# Altium PCB MainBoard.PcbDoc
Units mm, origin at the board's own origin, x right, y up, seen from the top; angles counter-clockwise.
Board outline 111.42 x 30.06 mm, 2 copper layers (Top Layer, Bottom Layer), stack 1.57 mm thick; 73 components, 57 nets, 246 pads, 45 vias.
Unrouted connection lines stored in the file: 7.
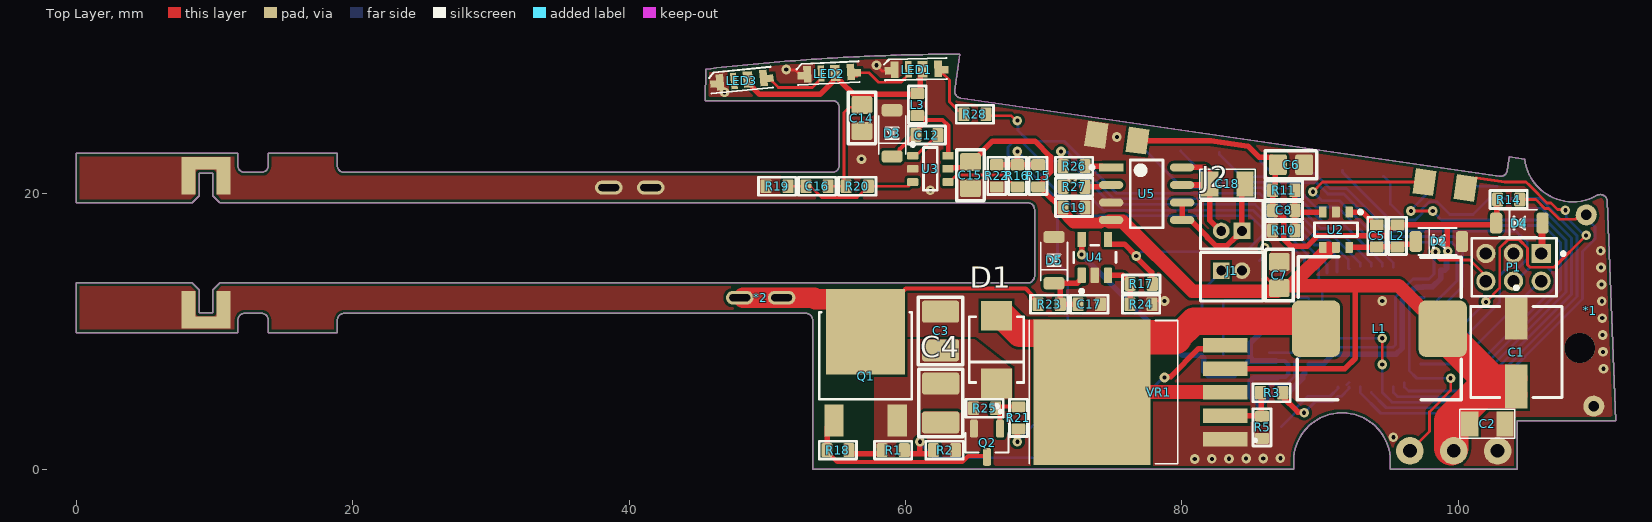
[diagram p0: Top Layer view]
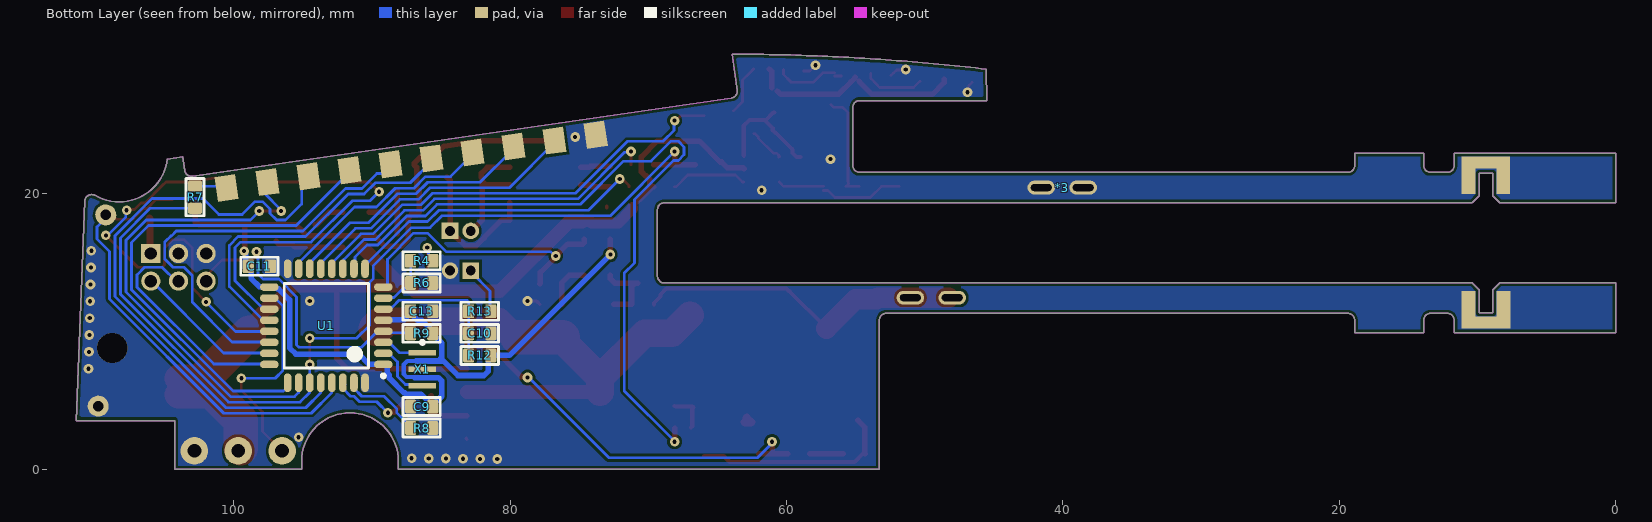
[diagram p1: Bottom Layer view, seen from below]
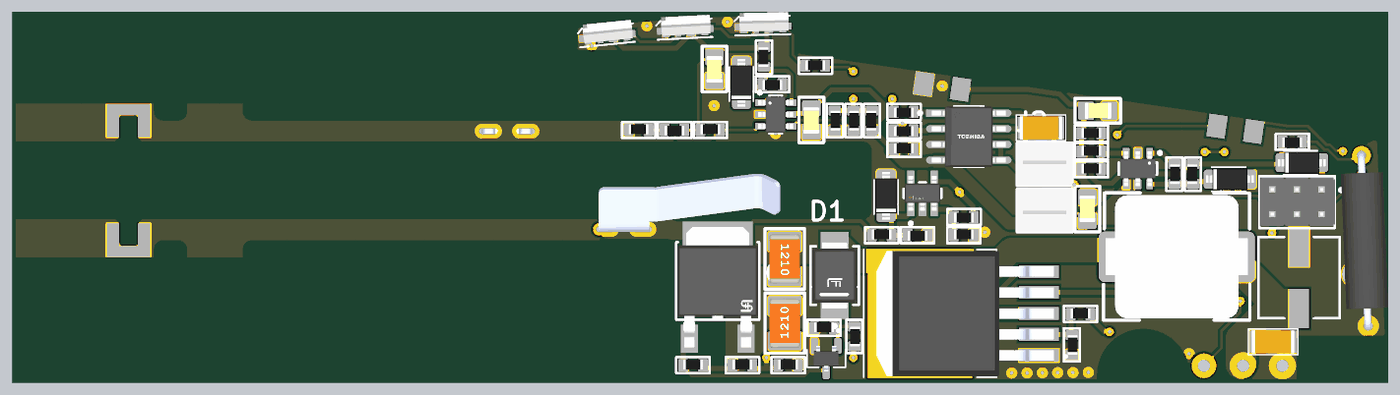
[diagram p2: 3D render of the assembled board from above, using the file's embedded part models]
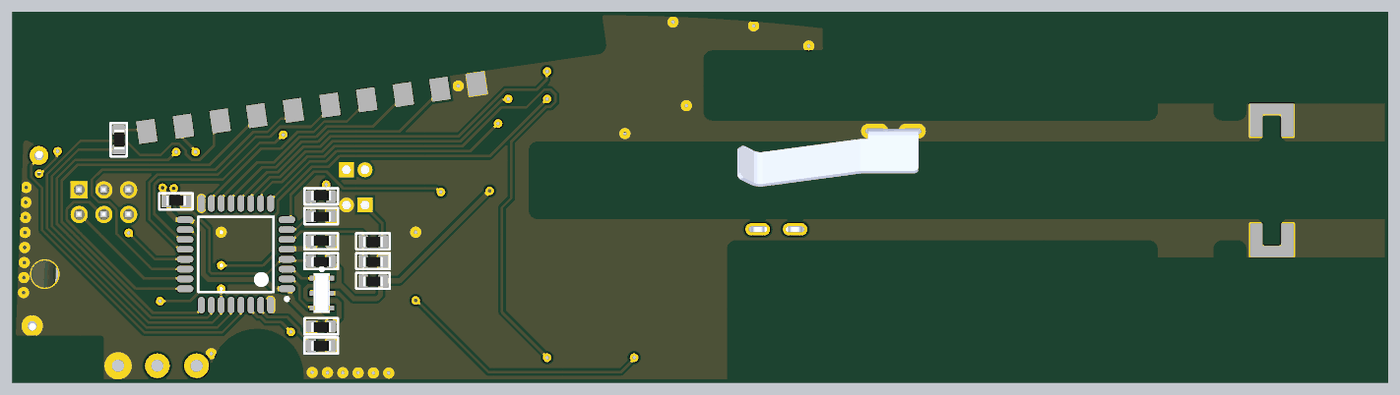
[diagram p3: 3D render of the assembled board from below, using the file's embedded part models]

## Layer stack, top to bottom
Top Solder: solder mask 0.0102, Solder Resist, Dk 3.5
Top Layer: signal copper 0.0356
Dielectric 1: core 1.4986, Core-043, Dk 4.3
Bottom Layer: signal copper 0.0356
Bottom Solder: solder mask 0.0102, Solder Resist, Dk 3.5

## Board outline
-0.013,9.897 11.691,9.897 11.691,10.797 cw(c12.191,10.797) 12.191,11.297 13.391,11.297 cw(c13.391,10.797) 13.891,10.797 13.891,9.897 18.891,9.897 18.891,10.797 cw(c19.391,10.797) 19.391,11.297 52.787,11.297 cw(c52.787,10.797) 53.287,10.797 53.287,0.001 88.087,0.001 88.087,0.601 cw(c91.587,0.601) 95.087,0.601 95.087,0.001 104.274,0.001 104.274,3.543 111.386,3.543 111.406,3.544 110.78,19.419 ccw(c110.28,19.399) 110.031,19.833 cw(c108.29,22.869) 104.813,22.466 103.691,22.629 103.547,21.639 cw(c103.052,21.711) 102.98,21.217 102.98,21.216 63.989,26.88 cw(c64.061,27.375) 63.567,27.447 63.946,30.056 63.561,30.055 63.175,30.053 62.79,30.049 62.405,30.045 62.02,30.041 61.635,30.035 61.251,30.028 60.866,30.02 60.481,30.012 60.096,30.002 59.712,29.992 59.327,29.981 58.943,29.969 58.559,29.955 58.175,29.941 57.791,29.926 57.407,29.911 57.023,29.894 56.639,29.876 56.256,29.858 55.872,29.838 55.489,29.818 55.106,29.796 54.722,29.774 54.339,29.751 53.956,29.727 53.573,29.702 53.19,29.676 52.807,29.649 52.424,29.622 52.041,29.593 51.659,29.564 51.276,29.533 50.893,29.502 50.511,29.47 50.128,29.437 49.746,29.403 49.363,29.368 48.981,29.332 48.599,29.295 48.216,29.257 47.834,29.219 47.452,29.179 47.07,29.139 46.688,29.098 46.307,29.056 45.925,29.013 45.543,28.969 45.504,26.698 54.699,26.698 cw(c54.699,26.198) 55.199,26.198 55.199,21.997 cw(c54.699,21.997) 54.699,21.497 19.391,21.497 cw(c19.391,21.997) 18.891,21.997 18.891,22.897 13.891,22.897 13.891,21.997 cw(c13.391,21.997) 13.391,21.497 12.191,21.497 cw(c12.191,21.997) 11.691,21.997 11.691,22.897 -0.013,22.897 -0.013,19.297 8.391,19.297 8.891,19.797 8.891,21.428 9.891,21.428 9.891,19.797 10.391,19.297 68.841,19.297 cw(c68.841,18.797) 69.341,18.797 69.341,13.997 cw(c68.841,13.997) 68.841,13.497 10.391,13.497 9.891,12.997 9.891,11.341 8.891,11.341 8.891,12.997 8.391,13.497 -0.013,13.497

## Design rules (kind name [scope] priority, off if disabled: settings)
BoardOutlineClearance [All] p1: gap=0 ignorepadtopadclearanceinfootprint=FALSE except(0.25: Track-OutlineEdge Track-CavityEdge Track-CutoutEdge Track-SplitBarrior Via-OutlineEdge Via-CavityEdge Via-CutoutEdge Via-SplitBarrior Text-OutlineEdge Text-CavityEdge Text-CutoutEdge Text-SplitBarrior)
Clearance Clearance_1 [InNamedPolygon('GND_L01_P002')] p1: gap=0.2 ignorepadtopadclearanceinfootprint=FALSE except(0: Arc-Hole Track-Hole SMDPad-Hole THPad-Hole Via-Hole Fill-Hole Poly-Hole Region-Hole Text-Hole)
Clearance [All] p2: gap=0.2 ignorepadtopadclearanceinfootprint=FALSE except(0: Arc-Hole Track-Hole SMDPad-Hole THPad-Hole Via-Hole Fill-Hole Poly-Hole Region-Hole Text-Hole)
MinimumSolderMaskSliver [All] p1: minsoldermaskwidth=0.2
PolygonConnect [All] p1: connectstyle=Direct reliefconductorwidth=0.254 reliefentries=4 polygonreliefangle="90 Angle" airgapwidth=0.254
RoutingVias [All] p1: holewidth=0.3 width=0.7 viastyle="Through Hole" minholewidth=0.3 minwidth=0.7 maxholewidth=1 maxwidth=1.5
SilkToSilkClearance [All] p1: silktosilkclearance=0.2
SilkToSolderMaskClearance [IsPad] p1: minsilkscreentomaskgap=0.2 clearancetoexposedcopper=TRUE
SolderMaskExpansion [All] p1: expansion=0.102 istentingtop=FALSE
Width [All] p1: maxlimit=4 minlimit=0.2 preferedwidth=0.2 minimp=50.000000 maximp=50.000000 favimp=50.000000
27 further rules are at their usual default settings.

## Components (designator, comment, footprint, x,y, rotation, side; value= is the part's Value field where it differs from the comment)
*1 "SW-200D" SW-200D 109.384,11.521 r272.26 top
*2 "Clipse" CLIPSE 48.01,12.428 r0 top locked
*3 "Clipse" CLIPSE 38.534,20.399 r0 bottom locked
C1 "47uF 50V" FP-THV6.3X7.7-MFG 104.2,8.5 r0 top
C2 "0.1uF" 1206 102.1,3.3 r180 top
C3 "100uF" C1210 62.538,10.023 r270 top
C4 "100uF" C1210 62.548,4.808 r90 top
C5 "0.1uF" R0603 94.1,16.904 r270 top
C6 "10uF" C0805 87.9,22.05 r180 top
C7 "4.7uF 50V" C0805 87.05,14.07 r270 top
C8 "33pF" R0603 87.373,18.75 r0 top
C9 "0.1uF" R0603 86.4,4.55 r0 bottom
C10 "0.1uF" R0603 82.2,9.85 r0 bottom
C11 "0.1uF" R0603 98.15,14.7 r180 bottom
C12 "0.1uF" R0603 61.55,24.2 r180 top
C13 "0.1uF" R0603 86.4,11.45 r180 bottom
C14 "10uF" C0805 56.85,25.43 r90 top
C15 "4.7uF 50V" C0805 64.7,21.3 r90 top
C16 "33pF" R0603 53.61,20.49 r180 top
C17 "2.2nF" R0603 73.3,11.95 r180 top
C18 "0.1uF" 1206 83.3,20.66 r0 top
C19 "0.1uF" R0603 72.2,18.95 r0 top
D1 "SK56" DO-214AA(SMB) 66.586,8.674 r90 top
D2 "" SOD-123 98.6,16.5 r180 top
D3 "" SOD-123 59.03,24.32 r270 top
D4 "" SOD-123 104.422,17.83 r180 top
D5 "1N5819HW" SOD-123 70.75,15.15 r270 top
J1 "Conn_JST_B2B-ZR_eec" JST_B2B-ZR_0 83.6,13.943 r0 top
J2 "Conn_JST_B2B-ZR_eec" JST_B2B-ZR_0 83.6,17.71 r180 top
L1 "1040" IND_1040 94.3,10.2 r180 top value=33uH
L2 "4.7µH" INDC1608X06L 95.6,16.904 r90 top
L3 "4.7µH" INDC1608X06L 60.86,26.4 r90 top
LED1 "SK6812SIDE-A-RVS" SK6812SIDE-A-RVS#1 60.665,29.16 r181.26 top
LED2 "SK6812SIDE-A-RVS" SK6812SIDE-A-RVS#2 54.339,28.873 r182.95 top
LED3 "SK6812SIDE-A-RVS" SK6812SIDE-A-RVS#3 48.01,28.361 r185.83 top
P1 "TSW-103-07-G-D" "DS-1025-05 - 2x3" 102,14.63 r180 top
Q1 "TSM480P06CP ROG" FP-TO-252-MFG 57.112,8.235 r0 top
Q2 "BC847A" SOT95P237X112-3N 65.9,1.935 r270 top
R1 "18.2K" R0603 59.112,1.4 r0 top
R2 "1K" R0603 62.825,1.4 r0 top
R3 "470" R0603 86.5,5.55 r0 top
R4 "100K" R0603 86.4,15.1 r180 bottom
R5 "100К" R0603 85.8,3.05 r270 top
R6 "10K" R0603 86.4,13.5 r0 bottom
R7 "470" R0603 102.798,19.702 r270 bottom
R8 "10K" R0603 86.4,3 r0 bottom
R9 "10K" R0603 86.4,9.85 r0 bottom
R10 "40.2K" R0603 87.373,17.3 r0 top
R11 "124K" R0603 87.373,20.2 r0 top
R12 "10K" R0603 82.2,8.25 r0 bottom
R13 "470" R0603 82.2,11.45 r0 bottom
R14 "10K" R0603 103.65,19.53 r180 top
R15 "~" R0603 69.6,21.25 r90 top
R16 "470" R0603 68.1,21.25 r270 top
R17 "200K" R0603 77.059,13.427 r180 top
R18 "10K" R0603 55.112,1.4 r0 top
R19 "23.7K" R0603 50.71,20.49 r0 top
R20 "124K" R0603 56.51,20.49 r0 top
R21 "1K" R0603 68.17,3.73 r270 top
R22 "100К" R0603 66.6,21.25 r270 top
R23 "10K" R0603 70.4,11.95 r0 top
R24 "1K" R0603 77.05,11.95 r0 top
R25 "100K" R0603 65.727,4.43 r0 top
R26 "470" R0603 72.2,21.95 r180 top
R27 "470" R0603 72.2,20.45 r180 top
R28 "470" R0603 65.023,25.7 r0 top
U1 "STM32F030K6T6" LQFP32_L 93.3,10.4 r0 bottom
U2 "BL9342" SOT23-6 91.15,17.35 r270 top
U3 "BL9342" SOT23-6 61.8,21.75 r0 top
U4 "LMV321IDBVR" FP-DBV0005A-MFG 73.7,15.35 r90 top
U5 "RZ7899" SOP-8_2-5R1S-IPC_B 77.45,19.95 r0 top
VR1 "XL6009" DPAK170P1435X465-6N 77,5.6 r180 top
X1 "CSTCE8M00G55-R0" MURA-CSTCE_G_A-3_V 86.35,7.25 r270 bottom

## Footprints (in the part's own frame and the unit in brackets; to place one, negate y for a bottom-side part, rotate by r counter-clockwise, add the part's x,y. Pads: shape width x height; smd on the part's side, far side on the other; paste and mask are expansions set on the pad)
1206 [mm] "Chip Capacitor, 2-Leads, Body 3.5x1.9mm, IPC High Density"
  rect 1.25x1.8 smd: 1(-1.275,0) 2(1.275,0)
  silkscreen extent -2,-1.05 2,1.05, body extent -1.75,-0.95 1.75,0.95, height 1.9
C0805 [mm]
  rrect25% 1.3x1.5 smd: 1(-0.95,0) 2(0.95,0)
  silkscreen extent -1.85,-1 1.85,1, body extent -1.1,-0.65 1.05,0.65, height 1.15
C1210 [mm]
  rrect25% 1.6x2.7 smd: 1(-1.4,0) 2(1.4,0)
  silkscreen extent -2.45,-1.6 2.45,1.6, body extent -2,-1.24 2,1.24, height 1.7
CLIPSE [mm]
  oval 2x1 hole 0.5 slot 1.5 at 0 deg: 1(0,0) 1(3.03,0)
  body extent -0.53,-0.2 14.16,4.51, height 4.5
DO-214AA(SMB) [mm]
  rect 2.16x2.26 smd paste+0 mask+0: 1(-2.45,0) 2(2.45,0)
  silkscreen extent -4.22,-1.97 2.37,1.97, body extent -3.63,-2.07 3.63,2.07, height 0.25
DPAK170P1435X465-6N [mm]
  rect 3.21x1.05 smd: 1(-6.13,3.4) 2(-6.13,1.7) 3(-6.13,0) 4(-6.13,-1.7) 5(-6.13,-3.4)
  rect 8.46x10.53 smd paste-6: 6(3.5,0)
  silkscreen extent -8.4,-5.18 8.05,5.18, body extent -7.34,-5.07 7.01,5.09, height 4.65
"DS-1025-05 - 2x3" [mm]
  rect 1.39x1.39 hole 0.89 paste-1000 mask+0: 1(-4,-1)
  round 1.39 hole 0.89 paste-1000 mask+0: 2(-4,1) 3(-2,-1) 4(-2,1) 5(0,-1) 6(0,1)
  silkscreen extent -5.72,-2.1 1.02,2.1, body extent -5.1,-1.99 0.97,1.94, height 4.88
FP-DBV0005A-MFG [mm]
  rrect17% 1.1x0.6 smd paste+0 mask+0: 1(-1.3,0.95) 2(-1.3,0) 3(-1.3,-0.95) 4(1.3,-0.95) 5(1.3,0.95)
  silkscreen extent -2.57,-1.53 0.87,1.53, body extent -1.95,-1.78 1.95,1.78, height 0.25
FP-THV6.3X7.7-MFG [mm] "SMD, 2-Leads, Body 6.6x6.6mm, Height 8mm"
  rect 1.6x3.2 smd: 1(0,2.5) 2(0,-2.5)
  silkscreen extent -3.3,-3.3 3.3,4.77, body extent -3.3,-3.65 3.3,3.65, height 8
FP-TO-252-MFG [mm]
  rect 1.4x2.29 smd paste+0 mask+0: 1(-2.285,-4.69) 3(2.285,-4.69)
  rect 5.69x6.18 smd paste+0 mask+0: 4(0,1.745)
  silkscreen extent -3.35,-3.15 3.35,3.15, body extent -3.45,-5.93 3.45,4.93, height 0.25
IND_1040 [mm]
  rrect30% 3.5x4.1 smd: 1(-4.58,0.01) 2(4.59,0.01)
  silkscreen extent -5.92,-5.18 5.94,5.15, body extent -5.75,-5 5.75,5, height 4
INDC1608X06L [mm]
  rrect25% 0.8x1 smd: 1(-0.8,0) 2(0.8,0)
  silkscreen extent -1.35,-0.65 1.35,0.65, body extent -0.8,-0.35 0.8,0.45, height 0.5
JST_B2B-ZR_0 [mm]
  rect 1.2x1.2 hole 0.7 paste-1000 mask+0: 1(-0.75,0.45)
  round 1.2 hole 0.7 paste-1000 mask+0: 2(0.75,0.45)
  silkscreen extent -2.25,-1.75 2.25,1.75, body extent -2.35,-1.85 2.35,1.85, height 0.25
LQFP32_L [mm] "QFP, 32-Leads, Body 7x7mm, Pitch 0.8mm, IPC High Density"
  oval 1.35x0.55 smd: 1(-4.125,2.8) 2(-4.125,2) 3(-4.125,1.2) 4(-4.125,0.4) 5(-4.125,-0.4) 6(-4.125,-1.2) 7(-4.125,-2) 8(-4.125,-2.8) 17(4.125,-2.8) 18(4.125,-2) 19(4.125,-1.2) 20(4.125,-0.4) 21(4.125,0.4) 22(4.125,1.2) 23(4.125,2) 24(4.125,2.8)
  oval 0.55x1.35 smd: 9(-2.8,-4.125) 10(-2,-4.125) 11(-1.2,-4.125) 12(-0.4,-4.125) 13(0.4,-4.125) 14(1.2,-4.125) 15(2,-4.125) 16(2.8,-4.125) 25(2.8,4.125) 26(2,4.125) 27(1.2,4.125) 28(0.4,4.125) 29(-0.4,4.125) 30(-1.2,4.125) 31(-2,4.125) 32(-2.8,4.125)
  silkscreen extent -4.25,-3.05 3.05,3.75, body extent -3.5,-3.5 3.5,3.5, height 1.6
MURA-CSTCE_G_A-3_V [mm] "SMD, 3-Leads, Body 3.2x1.3mm, Pitch 1.2mm"
  rect 0.4x2 smd: 1(-1.2,0) 2(0,0) 3(1.2,0)
  silkscreen extent -2.07,-0.13 -1.83,0.12, body extent -1.6,-0.65 1.6,0.65, height 0.7
R0603 [mm]
  rrect25% 0.8x1 smd: 1(-0.8,0) 2(0.8,0)
  silkscreen extent -1.35,-0.65 1.35,0.65, body extent -0.8,-0.35 0.8,0.45, height 0.5
SK6812SIDE-A-RVS#1 [mm]
  rect 0.5x0.55 smd mask+0.05: 1(-2.181,0.275) 4(1.923,0.275)
  rect 0.55x1.2 smd mask+0.05: 1(-1.7,0.201) 4(1.449,0.198)
  rect 0.7x1.2 smd mask+0.05: 2(-0.575,0.2)
  rect 0.45x1.2 smd mask+0.05: 3(0.45,0.2)
  silkscreen extent -2.3,-0.55 2.2,0.95, body extent -2.2,-0.85 1.8,0.65, height 2
SK6812SIDE-A-RVS#2 [mm]
  rect 0.5x0.55 smd mask+0: 1(-2.181,0.275) 4(1.923,0.275)
  rect 0.55x1.2 smd mask+0.05: 1(-1.7,0.201) 4(1.449,0.198)
  rect 0.7x1.2 smd mask+0.05: 2(-0.575,0.2)
  rect 0.45x1.2 smd mask+0.05: 3(0.45,0.2)
  silkscreen extent -2.3,-0.55 2.2,0.95, body extent -2.2,-0.85 1.8,0.65, height 2
SK6812SIDE-A-RVS#3 [mm]
  rect 0.5x0.55 smd mask+0.05: 1(-2.181,0.275) 4(1.923,0.275)
  rect 0.55x1.2 smd mask+0: 1(-1.7,0.201) 4(1.449,0.198)
  rect 0.7x1.2 smd mask+0.05: 2(-0.575,0.2)
  rect 0.45x1.2 smd mask+0.05: 3(0.45,0.2)
  silkscreen extent -2.3,-0.55 2.2,0.95, body extent -2.2,-0.85 1.8,0.65, height 2
SOD-123 [mil]
  rrect50% 35x60 smd: 1(-66,0) 2(66,0)
  silkscreen extent -50,-38 58,39, body extent -77,-35 77,35, height 46
SOP-8_2-5R1S-IPC_B [mm]
  rect 1.765x0.582 smd paste+0 mask+0: 1(-2.57,1.905)
  rrect100% 1.765x0.582 smd paste+0 mask+0: 2(-2.57,0.635) 3(-2.57,-0.635) 4(-2.57,-1.905) 5(2.57,-1.905) 6(2.57,-0.635) 7(2.57,0.635) 8(2.57,1.905)
  silkscreen extent -4.08,-2.45 1.19,2.45, body extent -3.7,-2.7 3.7,2.7, height 0.25
SOT23-6 [mm] "SOT23, 6-Leads, Body 3.05x1.75mm, Pitch 0.95mm, IPC High Density"
  rrect18% 0.8x0.55 smd: 1(-1.275,0.95) 2(-1.275,0) 3(-1.275,-0.95) 4(1.275,-0.95) 5(1.275,0) 6(1.275,0.95)
  silkscreen extent -1.4,-1.55 0.5,1.9, body extent -1.42,-1.46 1.42,1.46, height 1.11
SOT95P237X112-3N [mm]
  rrect50% 1.3x0.59 smd: 1(-1.025,0.95) 2(-1.025,-0.95) 3(1.025,0)
  silkscreen extent -2.37,-1.56 0.7,1.56, body extent -1.05,-1 1.05,1, height 1.1
SW-200D [mil]
  round 60 hole 30: 1(-271.65,5.91) 2(273.62,5.91)
  body extent -286,-62 288,72, height 142

## Part data
C1: library part "CAP ALUM SMD", Capacitance=100uF, Case/Package=Radial, ESR (Equivalent Series Resistance)=250mR, Max Operating Temperature=125°C, Min Operating Temperature=-40°C, Package Quantity=1, Ripple Current=175mA, Ripple Current (AC)=350mA, Tolerance=20%, Voltage=50V, Construction=Cylindrical, Diameter=10mm, Height=10.5mm, Height - Seated (Max)=0.413inch, Life (Hours)=3000Hour, Mount="Surface Mount", Packaging="Cut Tape", Radiation Hardening=No, REACH SVHC="No SVHC", RoHS Compliant=Yes, Series=THV, Termination=SMD/SMT, Voltage Rating=50V, Voltage Rating (DC)=50V
C2 C3 C4 C5 C6 C7 C8 C9 C10 C11 C12 C13 C14 C15 C16 C17 C18 C19: library part CAP
D1: library part DIODE_DO-214, "DO-214 Diode", Manufacturer Part Number=China
D2 D3 D4: library part Diode_SOD123, "Schottky diode SOD123", Note="Schottky diode  SOD123"
D5: library part Diode_SOD123, "Schottky diode SOD123 1N5819HW", Note="Schottky diode  SOD123"
J1 J2: "CONN HEADER ZH TOP 2POS 1.5MM", Digikey Part Number=455-1367-ND, Manufacturer=JST, Package=HDR2_PTH, Part Number=B2B-ZR, Temperature="-25°C to +85°C", Temperature Range High=+85°C, Temperature Range Low=-25°C, ComponentLink1Description=Upverter, ComponentLink1URL=https://upverter.com/upn/revision/d9455d7935cb45e6/, ComponentLink2Description=Datasheet, ComponentLink2URL=http://www.jst-mfg.com/product/pdf/eng/eZH.pdf, Digikey Description="CONN HEADER ZH TOP 2POS 1.5MM", helpURL=https://upverter.com/upn/revision/d9455d7935cb45e6/, Lead Free=no, RoHS=FALSE, Supplier 1=Digi-Key, Supplier 2=Mouser, Supplier Part Number 1=455-1367-ND
L1: library part IND_1040, "FIXED IND  1040 SMD", Manufacturer=Bourns, Manufacturer Part Number=SRR1210-680M, Rms Current=3A, Saturation Current=2.7A, Self Resonant Frequency=3.8MHz, Series Resistance=102mΩ, Temperature="-40°C to +125°C", Temperature Range High=+125°C, Temperature Range Low=-40°C, Test Frequency=2.52MHz, Tolerance=20%, Automotive=No, Category=Ind, ComponentLink2Description=Datasheet, ComponentLink2URL=https://www.bourns.com/docs/Product-Datasheets/SRR1210.pdf, Composition=Wirewound, Core Material=Ferrite, Device Class L1="Passive Components", Device Class L2=Inductors, Device Class L3="Fixed Inductors", Digikey Description="FIXED IND 68UH 3A 102 MOHM SMD", Height=10mm, Lead Free=Yes, Mouser Description="Fixed Inductors 68uH 20% SMD 1210", Octopart=https://octopart.com/srr1210-680m-bourns-10487145, Q Factor=12, RoHS=TRUE, Shielding=true
L2 L3: library part IND_1, "Inductor, SMD", Manufacturer="Taiyo Yuden", Manufacturer Part Number=LBMF1608T100K, Part Number=L0603-10µ, Datasheet=http://www.yuden.co.jp/ut/product/pdf/elb2_e.pdf, LatestRevisionDate=2012-09-19, Note="Inductor 10uH 10% 80mA 360mOhm 0603", Pin Count=2, Published=2010-02-24, Publisher="Nordic Semiconductor"
LED1 LED2 LED3: "2mA -40℃~+85℃ RGB SMD,2x4mm Light Emitting Diodes (LED) ROHS"
P1: library part "DS-1025-05 - 2x3", "Through Hole Header, Pitch 2.54 mm, 2 x 3 Position, Height 8.58 mm, Tail Length 2.54 mm, -55 to 125 degC, RoHS, Bulk", Color=Black, Manufacturer=Samtec-Inc., Package Description="Through Hole Header, Pitch 2.54 mm, 2 x 3 Position, Height 8.58 mm, Tail Length 2.54 mm", Category=Connectors,Interconnects, Connector Type=Header,Unshrouded, Contact Finish=Gold, Contact Finish Thickness=10µin(0.25µm), Contact Mating Length="0.230\"(5.84mm)", Contact Type=MalePin, Datasheet URL=http://suddendocs.samtec.com/catalog_english/tsw_th.pdf, Datasheet Version=12/2015, Family=RectangularConnectors-Headers,MalePins, Fastening Type=-, Features=-, Manufacturer Part Number=TSW-103-07-G-D, Manufacturer URL=http://www.samtec.com/, Mounting Technology=ThroughHole, Mounting Type=ThroughHole, Number of Positions=6, Number of Positions Loaded=All, Number of Rows=2, Package Reference=TSW-103-07-G-D, Package URL=http://suddendocs.samtec.com/prints/tsw-xxx-xx-xxx-x-xx-xxx-mkt.pdf, Packaging=Bulk, Pitch="0.100\"(2.54mm)", Row Spacing="0.100\"(2.54mm)", Series=TSW, Termination=Solder
Q1: "MOSFET P-CHANNEL 60V 20A TO252", Case/Package=TO-252-3, Continuous Drain Current (ID)=20A, Drain to Source Voltage (Vdss)=60V, Input Capacitance=1.25nF, Max Operating Temperature=150°C, Max Power Dissipation=66W, Min Operating Temperature=-50°C, Mount="Surface Mount", Packaging="Cut Tape", Rds On Max=48mR, RoHS Compliant=Yes
Q2: library part BC846A, "NPN Silicon AF Transistor, 45 V VCEO, 100 mA IC, SOT23, Reel, Green", Manufacturer=DIOTEC, ComponentLink1Description="Manufacturer URL", ComponentLink1URL=http://www.infineon.com/, ComponentLink2Description=Datasheet, ComponentLink2URL=http://www.infineon.com/dgdl/bc847series_bc848series_bc849series_bc850series.pdf?folderId=db3a304314dca389011541d30fa21656&fileId=db3a304314dca389011541d4630a1657, ComponentLink3Description="Package Specification", ComponentLink3URL=http://www.infineon.com/dgdl/SOT23-Package_Overview.pdf?folderId=db3a30431936bc4b0119532290053c66&fileId=db3a30431936bc4b0119533468123c85, Manufacturer Part Number=BC847A, Note="NPN Silicon AF Transistor, 45 V VCEO, 100 mA IC, SOT23, Reel, Green"
R1 R2 R3 R4 R5 R6 R7 R8 R9 R10 R11 R12 R13 R14 R15 R16 R17 R18 R19 R20 R21 R22 R23 R24 R25 R26 R27 R28: library part "RES SMD UNI", "Resistor SMD", Category=Resistors
U1: library part CMP-0304-00020-2, "ARM Cortex-M0 32-bit MCU, 32 KB Flash, 4 KB Internal RAM, 26 I/Os, 32-pin LQFP, -40 to 85 degC, Tray", I/Os (High Current)=26, Operating Frequency(F) (Processor speed) (MHz)=48, Supply Voltage(Vcc) min (V)=2.4, ComponentLink1Description="Manufacturer URL", ComponentLink1URL=http://www.st.com/web/en/home.html, ComponentLink2Description=Datasheet, ComponentLink2URL=http://www.st.com/st-web-ui/static/active/en/resource/technical/document/datasheet/DM00088500.pdf, ComponentLink3Description="Package Specification", ComponentLink3URL=http://www.st.com/st-web-ui/static/active/en/resource/technical/document/datasheet/DM00088500.pdf, Core="ARM Cortex-M0", DatasheetVersion="Rev. 1", FLASH Size (Prog) (kB)=32, Internal RAM Size (kB)=4, Mounting Technology="Surface Mount", PackageDescription="32-Pin Low Profile Quad Flat Package, 7 x 7 mm Body, 0.8 mm Pitch", PackageReference=LQFP32, PackageVersion="Rev. 1, 07/2013", Packing=Tray, PartNumber=STM32F030K6T6
U2 U3 U5: Package=None, Availability=Unavailable, Price=None
  U2 U3: MF="{'manufacturer': u'Texas Instruments'}", MP=BL9342
  U5: MF="{'manufacturer': u'Wuxi'}", MP=RZ7899
U4: library part LMV321, "IC OPAMP GP 1 CIRCUIT SOT23-5", Ambient Temperature Range High=+125°C, Ambient Temperature Range Low=-40°C, Input Bias Current=0.015uA, Input Offset Voltage=1.7mV, Manufacturer="Texas Instruments", Max Junction Temp=+150°C, Max Supply Voltage=5.5V, Min Supply Voltage=2.7V, Nominal Supply Current=80-130uA, Package=DBV0005A, Temperature="-40°C to +125°C", Voltage Gain=100V/mV, Automotive=No, Bandwidth=1MHz, Category=IC, ComponentLink2Description=Datasheet, ComponentLink2URL=http://www.ti.com/lit/ds/symlink/lmv321.pdf, Device Class L1="Integrated Circuits (ICs)", Device Class L2="Linear ICs", Device Class L3="Amplifiers - Op Amps", Digikey Description="IC OPAMP GP 1 CIRCUIT SOT23-5", Gain Bandwidth=1MHz, Height=1.45mm, Lead Free=Yes, Manufacturer Part Number=LMV321IDBVR, Mouser Description="Operational Amplifiers - Op Amps Low V R/R", Number of Channels=1, Octopart=https://octopart.com/lmv321idbvr-texas+instruments-410381, RoHS=TRUE, Standoff Height=0mm, Temperature Range High=+125°C, Temperature Range Low=-40°C
VR1: "The XL6009 regulator is a wide input range, current mode, DC/DC converter which is capable of generating either positive or negative output voltages.", Package=None, Availability=Unavailable, MF="{'manufacturer': u'XLSEMI'}", MP=XL6009, Price=None
X1: library part XTAL_SMD, "Ceramic Resonator, 8 MHz, +/- 0.5%, -20 to 80 degC, 3-Pin SMD, RoHS, Tape and Reel", Capacitance=33pF, Case/Package=Ceramic, Frequency=8MHz, Frequency Stability=0.2%, Frequency Tolerance=0.5%, Manufacturer=Murata, Max Operating Temperature=80degC, Min Operating Temperature=-20degC, Package Description="3-Pin Surface Mount Device, Body 3.2 x 1.3 mm, Pitch 1.2 mm", Package Quantity=1, Package Reference=CSTCE_G_A-3, Composition=Ceramic, Contact Plating=Gold, Datasheet URL=http://www.murata.com/~/media/webrenewal/support/library/catalog/products/timingdevice/ceralock/p16e.ashx, Datasheet Version=42339.0, Height=0.031inch, Lead Free=LeadFree, Length=0.126inch, Load Capacitance=33pF, Manufacturer URL=http://www.murata.com/, Mount=SurfaceMount, Number of Pins=3, Packaging=TapeandReel, REACH SVHC=NoSVHC, RoHSCompliant=True, Self Resonant Frequency=8MHz, Termination=SMD/SMT, Tolerance=0.5%, Width=0.051inch

## Free pads (board coordinates)
  rect 1.5x1.85 smd rot 171.73 mask+0.05: 1(73.809,24.225) 2(76.777,23.795) 3(97.555,20.796) 4(100.524,20.368)
  rect 1.5x1.85 smd far side rot 171.73 mask+0.05: 5(100.524,20.368) 6(97.555,20.796) 7(94.587,21.224) 8(91.618,21.653) 9(88.65,22.081) 10(85.682,22.509) 11(82.714,22.939) 12(79.745,23.367) 13(76.777,23.795) 14(73.809,24.225)
  round 2 hole 1: 15(102.85,1.35) 16(99.675,1.35) 17(96.5,1.35)
  rect 1x2.7 smd: 18(8.13,11.55) 18(8.13,21.25) 18(10.65,11.55) 18(10.65,21.25)
  rect 1x2.7 smd far side: 18(8.13,11.55) 18(8.14,21.29) 18(10.65,11.55) 18(10.66,21.29)
  rect 2.7x0.88 smd: 18(9.314,10.639) 18(9.466,22.161)
  rect 2.7x0.88 smd far side: 18(9.314,10.639) 18(9.476,22.201)
  round 2.2 hole 2.2: 19(108.79,8.79)

## Via types
v1: diameter 0.7, hole 0.3, Top Layer to Bottom Layer, 45 vias

## Nets (pads, with @x,y where several pads share a name; then routed paths per layer and width w, separated by ;. In a path a pad name is that pad's centre, name@x,y a point inside that pad or via, vN(x,y) a via of type N, cw(c..) or ccw(c..) an arc to the next point about the centre after c; other vN are vias at no path point)
"3.3V MB": C6.2 C8.1 C9.1 C11.1 C13.1 D4.2 L2.2 pad.2 R9.1 R11.1 R12.1 R14.2 U1.1 U1.5 U1.17 U4.5 | length 91.1
  Top Layer w0.4: v1(72.75,15.55) U4.5 ; pad.2@76.778,23.795 82.096,23.795 84.787,23.405 84.88,23.311 85.591,22.6 86.5,22.6 86.95,22.15 C6.2 86.761,21.861 86.761,20.338 86.573,20.15 C8.1 86.573,18.65 86.773,18.45 87.139,18.45 87.373,18.216 87.373,16.693 87.916,16.15 87.97,16.15 89.063,16.15 89.818,16.904 94.707,16.904 95,17.197 95,17.204 95.5,17.704 L2.2 99.2,17.704 ; v1(99.25,15.8) 99.2,15.85 99.2,17.704 ; D4.2@102.687,17.889 102.503,17.704 99.2,17.704 ; D4.2 102.798,17.882 102.798,19.478 R14.2
  Bottom Layer w0.3: 86.8,7.85 87.445,7.85 87.7,7.595 87.7,6.905 87.495,6.7 86.95,6.7
  Bottom Layer w0.4: v1(72.75,15.55) 80.05,8.25 R12.1 81.595,8.055 81.595,7.105 81.9,6.8 83.779,6.8 84.829,7.85 85.184,7.85 ; C9.1 C9.1@85.6,4.6 ; 86.8,7.85 85.184,7.85 ; 86.9,6.65 85.184,6.65 84.95,6.416 84.95,5.3 85.6,4.65 C9.1@85.6,4.6 ; 88.891,7.3 88.891,6.963 88.746,6.818 88.746,6.608 87.688,5.55 87.616,5.55 87.516,5.45 86.45,5.45 C9.1@85.6,4.6 ; U1.5@88.947,10.842 88.934,10.829 88.706,10.829 88.692,10.842 87.665,10.842 87.4,11.107 87.4,11.15 87.25,11.3 87.2,11.3 86.7,10.8 86.407,10.8 86.107,10.5 86.1,10.5 85.6,10 R9.1 85.6,9.8 84.95,9.15 84.95,8.084 85.184,7.85 ; U1.1@89.219,7.608 90.208,7.608 90.95,8.35 95.5,8.35 95.95,8.8 95.95,12.28 96.745,13.075 96.859,13.075 96.984,13.2 U1.17 97.454,13.229 98.154,13.229 98.75,13.825 98.75,14.4 98.781,14.431 99.031,14.431 99.15,14.55 99.15,15.619 99.25,15.719 v1(99.25,15.8)
5V: C14.2 C16.1 L3.2 LED1.2 LED2.2 LED3.2 R20.1 | length 22.5
  Top Layer w0.2: C16.1@54.74,20.49 R20.1 R20.1@55.489,20.711 ; R20.1@55.549,20.821 55.549,25.819 55.94,26.21 56.601,26.21 C14.2@56.775,26.384
  Top Layer w0.4: LED3.2 48.602,27.997 49.452,27.148 53.807,27.148 54.743,28.084 ; LED2.2@55.024,28.365 55.342,28.048 55.342,28.043 56.235,27.15 60.426,27.15 L3.2@60.66,27.384 ; 61.081,27.63 61.081,28.809 LED1.2
5VE: R7.2 R15.2 R16.1 R22.1 U1.27 | length 70
  Top Layer w0.2: v1(94.5,7.6) v1(94.5,9.5)
  Top Layer w0.4: R22.1 R16.1 ; v1@68.1,23.15 R16.1 ; R15.2 R16.1
  Bottom Layer w0.2: v1(68.1,23.009) 72.749,18.36 84.94,18.36 85.8,17.5 87.148,17.5 89.9,14.748 89.9,13.805 90.15,13.555 90.15,10.45 91.1,9.5 v1(94.5,9.5) ; v1(94.5,7.6) 94.5,5.975 94.5,5.562 95.192,4.87 100.389,4.87 108.195,12.676 108.195,13.796 108.195,16.751 106.046,18.9 R7.2@102.816,18.9
"BATTERY +": C1.2 C2.2 C7.2 C15.2 C19.1 L1.1 pad.16 R4.2 R15.1 U2.4 U2.5 U3.5 U5.4 VR1.4 | length 82.7
  Top Layer w0.2: v1(86,16.05) 86,14 86.95,13.05 C7.2@87.05,13.05
  Top Layer w0.4: U3.5 63.15,21.825 64.275,21.825 C15.2 64.8,22.25 66.309,23.759 69.357,23.759 70.5,22.616 70.5,21.543 70.207,21.25 70.134,21.25 69.9,21.016 69.9,20.65 R15.1@69.7,20.45 ; R15.1 R15.1@69.7,20.45 ; C19.1@71.15,18.95 71.15,19.05 70.65,19.55 70.6,19.55 R15.1@69.7,20.45 ; VR1.4 91.8,7.3 92.55,8.05 92.55,13.3
  Top Layer w0.8: C19.1@71.15,18.95 71.15,18.85 71.275,18.725 72.15,17.85 74.093,17.85 74.179,17.936 74.771,17.936 U5.4
  Top Layer w1: U5.4@74.771,17.936 75.714,17.936 80.75,12.9 86.9,12.9 C7.2@87.05,13.05 ; C7.2@87.05,13.3 88.05,13.3 92.55,13.3 95.67,13.3 97.33,11.64 97.63,11.64 98.88,10.39 L1.1 L1.1@98.88,10.09 ; 88.05,13.45 90.6,16
  Top Layer w2: L1.1@98.88,9.89 L1.1@98.88,10.09 ; 101.375,5.4 102.17,5.4 C1.2@104,5.4 ; 102.17,6.6 C1.2@104,6.6
  Top Layer w2.5: L1.1@98.88,9.89 102.17,6.6 ; pad.16@99.5,1.525 99.5,3.525 100.05,4.075 101.375,5.4
  Bottom Layer w0.2: R4.2 85.9,15.4 85.9,15.815 86,15.915 v1(86,16.05)
BUTTON: C10.2 R12.2 R13.2 U1.6 | length 9.9
  Bottom Layer w0.2: R12.2@83,8.3 C10.2 R13.2 83,12.133 83.117,12.25 88.026,12.25 88.519,11.757 88.523,11.757 88.745,11.535 U1.6@88.745,11.531
GND: *1.2 *3.1 C1.1 C2.1 C3.1 C4.1 C6.1 C7.1 C9.2 C10.1 C11.2 C13.2 C14.1 C15.1 C17.1 C19.2 D2.1 D3.1 D5.1 J1.2 LED1.4 LED2.4 LED3.4 P1.3 P1.5 pad.1 pad.14 pad.15 pad.18 pad.19 Q2.2 R2.2 R5.2 R6.1 R8.1 R10.1 R19.1 R22.2 R24.2 R25.1 U1.16 U1.32 U2.2 U3.2 U4.2 U5.3 VR1.1 X1.2 | length 5.6
  Top Layer w0.2: LED3.4@46.588,28.016 46.811,27.794 46.811,27.529 46.907,27.433 v1(46.907,27.298) ; v1(51.375,28.939) 51.406,28.907 52.025,28.907 52.245,28.687 52.269,28.687 52.433,28.523 LED2.4@52.433,28.499 ; v1(57.9,29.25) 58.307,28.843 LED1.4@58.748,28.843
  Top Layer w0.25: C19.2 C19.2@73,19.05 ; R24.2 78.093,12.193 v1(78.744,12.193) v1@78.826,12.275 ; VR1.1 VR1.1@83.18,2.25 ; v1@95.26,2.53 95.26,2.377 v1(95.303,2.334)
  Top Layer w0.5: v1@94.52,12.19 v1@94.55,12.16
  Top Layer w0.6: C4.1@62.879,3.74 C4.1 C4.1@63.025,3.408
  other v1: 80.93,0.76 82.17,0.77 83.41,0.78 84.65,0.79 85.89,0.8 87.13,0.81 110.51,7.29 110.48,8.51 110.45,9.73 110.42,10.95 110.39,12.17 94.5,12.19 110.36,13.39 110.33,14.61 110.3,15.83 61.8,20.2 56.82,22.46 75.3,24.06
"JOYSTICK D": pad.12 U1.14 | length 18.2
  Bottom Layer w0.2: pad.12@79.915,23.05 82.179,20.786 85.963,20.786 86.799,19.95 88.146,19.95 90.246,17.85 91.588,17.85 94.5,14.938 U1.14@94.5,14.7
"JOYSTICK L": pad.3 U1.19 | length 26.1
  Top Layer w0.2: v1(89.481,20.1) 90.177,20.796 pad.3
  Bottom Layer w0.2: v1(89.481,20.1) 90.139,19.442 91.408,19.442 94.4,16.45 99.519,16.45 99.9,16.069 99.9,13.66 97.86,11.62 U1.19@97.487,11.62
"JOYSTICK R": pad.4 U1.21 | length 29.7
  Top Layer w0.2: pad.4 101.252,21.096 101.349,21.096 103.371,20.802 104.911,20.802 105.172,20.542 106.422,19.292 106.703,19.292 107.173,18.822 107.688,18.822 v1(107.75,18.76) ; v1(102,12.13) 102.995,13.125 102.995,16.032 103.588,16.625 104.412,16.625 105.005,16.032 105.005,14.811 105.181,14.635 106.945,14.635 v1(109.25,16.94)
  Bottom Layer w0.2: U1.21@97.415,9.99 99.86,9.99 v1(102,12.13) ; v1(107.75,18.76) 107.809,18.701 107.809,18.268 109.137,16.94 v1(109.25,16.94)
"JOYSTICK U": pad.13 U1.13 | length 20.9
  Bottom Layer w0.2: pad.13 76.777,23.647 80.038,20.386 85.797,20.386 86.633,19.55 87.98,19.55 90.08,17.45 91.188,17.45 93.7,14.938 U1.13@93.7,14.7
"JOYSTICK С": pad.11 U1.15 | length 16.3
  Bottom Layer w0.2: pad.11 82.714,22.791 84.319,21.186 86.128,21.186 86.965,20.35 88.312,20.35 89.675,18.987 91.251,18.987 95.3,14.938 U1.15@95.3,14.638
"LED PWM": R28.2 U1.12 | length 32
  Top Layer w0.2: R28.2@65.95,25.6 67.635,25.6 67.995,25.24 v1@68.13,25.24
  Bottom Layer w0.2: v1@68.13,25.24 68.146,25.224 68.146,24.53 68.926,23.75 71.5,23.75 75.264,19.986 85.631,19.986 86.468,19.15 87.814,19.15 89.914,17.05 90.788,17.05 92.9,14.938 U1.12@92.9,14.7
  other v1: 68.1,25.24
"MOTOR CCW": R27.2 U1.9 | length 22.6
  Top Layer w0.2: R27.2 71.4,20.55 71.771,20.921 71.976,20.921 v1(72.072,21.017)
  Bottom Layer w0.2: v1(72.072,21.017) 74.329,18.76 85.16,18.76 85.97,17.95 87.317,17.95 88.697,16.57 90.215,15.053 90.277,15.053 90.5,14.83 U1.9@90.5,14.225
"MOTOR CW": R26.2 U1.11 | length 25.7
  Top Layer w0.2: R26.2@71.25,22.05 v1(71.25,23.009)
  Bottom Layer w0.2: v1(71.25,23.009) 71.301,22.957 71.718,22.957 75.09,19.586 85.466,19.586 86.302,18.75 87.649,18.75 89.749,16.65 90.575,16.65 92.033,15.192 92.033,14.592 U1.11
NetC5_1: C5.1 U2.1 | length 2.4
  Top Layer w0.4: U2.1 92.125,18.6 93.104,18.6 94,17.704 C5.1
NetC5_2: C5.2 D2.2 L2.1 U2.6 | length 5
  Top Layer w0.4: U2.6 92.115,16.09 94.085,16.09 C5.2 L2.1 95.798,16.302 96.726,16.302 D2.2
NetC8_2: C8.2 R10.2 R11.2 U2.3 | length 5.1
  Top Layer w0.4: R10.2@88.173,17.05 C8.2@88.173,18.6 ; R11.2@88.173,20.15 C8.2@88.173,18.6 ; U2.3 90.188,18.613 88.186,18.613 C8.2@88.173,18.6
NetC12_1: C12.1 U3.1 | length 2.6
  Top Layer w0.2: U3.1@60.506,22.627 U3.1@60.566,22.611 ; U3.1 60.7,22.875 60.925,22.875 62.05,24 62.05,24.05 62.3,24.3 C12.1@62.35,24.3
NetC12_2: C12.2 D3.2 L3.1 U3.6 | length 8.9
  Top Layer w0.3: D3.2@59,22.624 59.278,22.624 59.567,22.913 59.567,23.167 60.75,24.35 60.8,24.35 61,24.55 61,24.7 61.6,25.3 61.726,25.3 ; L3.1@60.86,25.83 60.96,25.83 61.49,25.3 61.726,25.3 ; U3.6 63.1,22.725 63.1,24.866 63.095,24.871 63.095,24.885 62.68,25.3 61.726,25.3
NetC16_2: C16.2 R19.2 R20.2 U3.3 | length 9.4
  Top Layer w0.2: R19.2@51.84,20.49 C16.2 53.14,20.49 53.94,19.69 56.506,19.69 57.006,20.19 R20.2@57.34,20.19 ; R20.2 60.215,20.49 U3.3
NetC17_2: C17.2 D5.2 R23.2 U4.1 | length 5.3
  Top Layer w0.4: D5.2 D5.2@70.957,13.474 ; C17.2 R23.2 71.2,13.231 D5.2@70.957,13.474 ; U4.1 72.75,13.8 72.424,13.474 D5.2@70.957,13.474
NetC18_1: C18.1 J2.2 U5.7 U5.8 | length 9
  Top Layer w0.4: U5.7 81.735,20.585 82.025,20.875 C18.1@82.025,21.15 ; U5.8 81.645,21.855 82.075,21.425 C18.1@82.075,21.15 ; C18.1@82.025,20.96 82.025,18.025 J2.2@82.85,17.2
NetC18_2: C18.2 J2.1 U5.5 U5.6 | length 10.8
  Top Layer w0.4: U5.6 U5.5 80.612,18.045 81.85,16.807 81.85,16.786 82.436,16.2 83.264,16.2 83.864,16.8 83.95,16.8 84.35,17.2 84.35,20.925 C18.2@84.575,21.15
NetD1_2: D1.2 L1.2 VR1.3 VR1.6 | length 36.4
  Top Layer w1: VR1.6 VR1.3
  Top Layer w2: D1.2@66.98,11.17 68.285,9.865 70.27,9.865 VR1.6@73.5,6.635 ; VR1.6 VR1.6@73.5,6.635 ; VR1.6@76.209,9.344 VR1.6@73.5,6.635 ; 79.494,9.344 80.878,10.729 L1.2@88.821,10.729
  Top Layer w2.5: VR1.6@76.209,9.584 79.494,9.584 ; L1.2@89.456,10.444 L1.2
NetD4_1: D4.1 P1.1 | length 2.2
  Top Layer w0.5: P1.1@106,16 106.049,16.049 106.049,18.151 D4.1@106.099,18.2
NetJ1_1: J1.1 R13.1 | length 3.5
  Bottom Layer w0.2: R13.1@81.45,11.362 81.45,12.923 J1.1@82.85,14.323
NetLED1_1: LED1.1 R28.1 | length 3.7
  Top Layer w0.2: LED1.1@62.369,28.997 62.655,28.711 63.19,28.176 63.19,26.61 R28.1@63.85,25.95
NetLED1_3: LED1.3 LED2.1 | length 5.1
  Top Layer w0.2: LED2.1@56.048,28.481 LED2.1@56.531,28.481 ; LED2.1@56.531,28.71 57.361,28.71 58.049,28.022 59.658,28.022 60.219,28.583 LED1.3
NetLED2_3: LED2.3 LED3.1 | length 4.4
  Top Layer w0.2: LED3.1@50.348,28.1 50.8,27.648 53.266,27.648 53.507,27.889 53.507,27.898 53.9,28.292 LED2.3
NetQ1_1: Q1.1 Q2.3 R18.1 | length 14.7
  Top Layer w0.3: R18.1@54.312,1.15 54.462,1.15 55.062,0.55 64.111,0.55 64.541,0.98 Q2.3@65.95,0.98
  Top Layer w0.4: R18.1@54.312,1.15 54.327,1.165 54.327,3.045 Q1.1
NetQ2_1: Q2.1 R21.1 R25.2 | length 2.9
  Top Layer w0.3: Q2.1@66.9,3.03 66.825,3.105 66.825,4.425 66.75,4.5 66.8,4.55 68.05,4.55 R21.1@68.1,4.6
NetR1_2: R1.2 R2.1 VR1.5 | length 28.5
  Top Layer w0.4: R1.2@59.912,1.15 60.969,1.15 ; v1@61.05,1.9 61.05,1.231 60.969,1.15 ; R2.1@62.025,1.15 60.969,1.15 ; v1(78.744,6.65) 78.801,6.707 79.182,6.707 81.213,8.738 82.868,8.738 VR1.5
  Bottom Layer w0.2: v1@61.05,1.9 62.1,0.85 72.86,0.85 v1@78.544,6.534
  other v1: 61.05,2.01
NetR3_1: R3.1 R5.1 VR1.2 | length 4.2
  Top Layer w0.4: VR1.2 83.155,3.875 R5.1@85.775,3.875 ; R3.1@85.7,5.35 85.75,5.3 85.75,3.9 R5.1@85.775,3.875 ; R5.1 R5.1@85.775,3.875
NetR4_1: R4.1 R6.2 U1.7 | length 4.1
  Bottom Layer w0.2: R4.1 R6.2 87.2,13.4 87.5,13.1 87.762,13.1 88.412,12.45 89.09,12.45 U1.7@89.188,12.352
NetR7_1: pad.5 R7.1 | length 2.3
  Bottom Layer w0.2: pad.5 100.658,20.502 R7.1
NetR8_2: R8.2 U1.31 | length 5.5
  Bottom Layer w0.2: R8.2@87.2,3.1 88.2,4.1 88.2,4.369 89.131,5.3 90.738,5.3 91.3,5.862 U1.31@91.3,5.975
NetR16_2: R16.2 U3.4 | length 5.6
  Top Layer w0.2: U3.4 63.2,20.8 63.7,21.3 64.9,21.3 65.479,21.3 67.15,21.3 68,20.45 R16.2
NetR17_2: R17.2 R24.1 U4.3 | length 3.4
  Top Layer w0.4: U4.3 75.736,14.05 76.259,13.527 R17.2 76.254,13.423 76.254,11.954 R24.1
NetR26_1: R26.1 U5.1 | length 2.2
  Top Layer w0.4: R26.1@72.75,21.95 74.193,21.95 74.288,21.855 U5.1
NetR27_1: R27.1 U5.2 | length 2.2
  Top Layer w0.4: R27.1@72.75,20.45 74.104,20.45 74.239,20.585 U5.2
NetU1_2: U1.2 X1.3 | length 4.4
  Bottom Layer w0.2: X1.3 86.45,6.15 87.581,6.15 88.15,6.719 88.15,7.788 88.762,8.4 U1.2
NetU1_3: U1.3 X1.1 | length 3.1
  Bottom Layer w0.2: X1.1 87.995,8.45 88.745,9.2 U1.3
ONEWIRE: pad.17 U1.18 | length 15.7
  Top Layer w0.2: pad.17 97.91,2.76 97.91,4.17 99.45,5.71 v1(99.45,6.6)
  Bottom Layer w0.2: U1.18@97.537,12.451 97.063,12.451 96.45,11.838 96.45,7.15 97,6.6 v1(99.45,6.6)
RESET: P1.6 R9.2 U1.4 | length 22.1
  Top Layer w0.2: v1@98.05,15.75 98.65,15.15 100.85,15.15 P1.6@102,14
  Bottom Layer w0.2: R9.2@87.2,9.9 88.58,9.9 88.613,9.933 89.355,9.933 89.388,9.9 89.688,9.9 90.738,8.85 95.293,8.85 95.45,9.007 95.45,12.487 96.738,13.775 97.874,13.775 98.25,14.151 98.25,15.266 98.283,15.298 98.283,15.683 v1(98.35,15.75)
"SCREEN CS": pad.9 U1.22 | length 31.1
  Bottom Layer w0.2: pad.9 89.311,21.42 89.646,21.42 90.726,20.34 91.91,20.34 95,17.25 104.157,17.25 104.507,16.9 104.55,16.9 104.936,16.514 104.995,16.455 104.995,15.218 104.407,14.63 103.593,14.63 103.005,14.042 103.005,12.106 100.119,9.22 U1.22@97.446,9.22
"SCREEN LED": pad.10 U1.20 | length 24.2
  Bottom Layer w0.2: pad.10 85.682,22.298 87.23,20.75 89.75,20.75 90.563,19.937 91.713,19.937 94.8,16.85 99.685,16.85 100.32,16.215 100.32,13.24 97.89,10.81 U1.20@97.467,10.81
"SCREEN RS": pad.8 U1.25 | length 36.2
  Bottom Layer w0.2: pad.8 91.618,21.505 95.473,17.65 106.164,17.65 107.395,16.419 107.395,13.008 100.057,5.67 96.4,5.67 96.1,5.97 U1.25
"SCREEN SCL": pad.6 U1.26 | length 34.1
  Top Layer w0.2: v1@96.62,18.7 v1(98.15,18.7)
  Bottom Layer w0.2: U1.26@95.3,5.975 95.3,5.562 95.592,5.27 100.223,5.27 107.795,12.842 107.795,16.585 106.33,18.05 98.8,18.05 v1(98.15,18.7) ; v1@96.57,18.65 v1(96.57,18.7) 96.57,18.79 pad.6@97.795,20.015 ; pad.6@97.37,20.611 pad.6
"SCREEN SDA": pad.7 U1.28 | length 42
  Bottom Layer w0.2: 93.7,5.562 94.792,4.47 100.554,4.47 108.595,12.511 108.595,13.631 108.595,16.916 105.909,19.602 102.232,19.602 101.08,18.45 99.39,18.45 98.461,19.379 97.91,19.379 97.375,18.844 97.375,18.535 96.889,18.05 96.251,18.05 95.086,19.215 95.086,20.726 pad.7
"SOLDERING TIP": C3.2 C4.2 D1.1 Q1.3 R1.1 R18.2 | length 2.4
  Top Layer w0.4: R18.2@55.912,1.15 R1.1@58.312,1.15
SWCLK: P1.4 U1.24 | length 16.6
  Bottom Layer w0.2: U1.24@97.272,7.63 101.44,7.63 106.995,13.185 106.995,14.085 106.445,14.635 105.181,14.635 104.176,13.63 P1.4
SWDIO: P1.2 U1.23 | length 11.1
  Bottom Layer w0.2: U1.23@97.288,8.43 100.73,8.43 P1.2@106.15,13.85
TEMP: R17.1 U1.8 U4.4 | length 20.9
  Top Layer w0.4: U4.4 74.65,16.4 74.75,16.3 75.85,16.3 v1(76.7,15.45) ; v1@76.717,15.352 77.805,14.264 77.805,13.48 R17.1
  Bottom Layer w0.2: v1(76.7,15.45) 76.757,15.45 77.067,15.76 84.63,15.76 85.97,17.1 86.982,17.1 88.875,15.207 88.875,13.362 89.037,13.2 U1.8
"TIP +": *2.1 Q1.4 R23.1 | length 24.3
  Top Layer w0.3: Q1.4 57.112,10.189 57.112,10.225 59.807,12.92 59.843,12.92 60.02,13.097 68.703,13.097 69.128,12.672 69.128,12.522 69.6,12.05 R23.1
  Top Layer w1.5: *2.1@48.26,12.422 53.389,12.422 53.491,12.32 55.017,12.32 57.112,10.225 Q1.4@57.112,10.189
"TIP BOOST EN": R3.2 U1.30 | length 6.4
  Top Layer w0.4: R3.2@87.3,5.35 87.3,5.25 88.393,4.157 88.793,4.157 v1(88.85,4.1)
  Bottom Layer w0.2: v1(88.85,4.1) 89.65,4.9 90.904,4.9 91.304,5.3 91.538,5.3 92.1,5.862 U1.30@92.1,5.975 ; U1.30@91.938,6.138 U1.30@92.1,6.3
"TIP PWM": R21.2 U1.10 | length 54.3
  Top Layer w0.4: v1@68.1,2.05 R21.2@68.1,3
  Bottom Layer w0.2: v1@68.1,2.05 71.75,5.7 71.75,14.2 71,14.95 71,19.543 68.184,22.359 67.831,22.359 67.41,22.779 67.41,23.336 67.833,23.759 68.351,23.759 69.8,22.31 71.8,22.31 74.924,19.186 85.3,19.186 86.136,18.35 87.483,18.35 89.583,16.25 90.35,16.25 91.233,15.367 U1.10@91.233,14.292
  other v1: 68.1,2.01
VIBRATE: *1.1 R14.1 U1.29 | length 32.8
  Top Layer w0.2: R14.1 105.618,19.53 106.256,18.892 106.537,18.892 107.319,18.11 108.483,18.11 108.541,18.168 109.009,18.168 *1.1
  Bottom Layer w0.2: U1.29@92.9,5.975 92.9,5.562 94.392,4.07 100.72,4.07 108.995,12.345 108.995,15.766 109.9,16.671 109.9,17.558 109.262,18.196 *1.1
pads on no net: LED3.3

## Polygon pours and split planes (outlines as drawn)
GND on Top Layer "GND_L01_P003" (solid, remove dead copper, pour order 3): 0,9.897 0,13.497 8.404,13.497 8.904,12.997 8.904,11.34 9.904,11.34 9.904,12.997 10.404,13.497 68.854,13.497 ccw(c68.854,13.997) 69.354,13.997 69.354,18.797 ccw(c68.854,18.797) 68.854,19.297 10.404,19.297 9.904,19.797 9.904,21.427 8.904,21.427 8.904,19.797 8.404,19.297 0,19.297 0,22.897 11.704,22.897 11.704,21.997 ccw(c12.204,21.997) 12.204,21.497 13.404,21.497 ccw(c13.404,21.997) 13.904,21.997 13.904,22.897 18.904,22.897 18.904,21.997 ccw(c19.404,21.997) 19.404,21.497 54.712,21.497 ccw(c54.712,21.997) 55.212,21.997 55.212,26.197 ccw(c54.712,26.197) 54.712,26.697 45.517,26.697 45.556,28.968 45.938,29.012 46.319,29.055 46.701,29.097 47.083,29.139 47.465,29.179 47.847,29.218 48.229,29.257 48.611,29.295 48.994,29.331 49.376,29.367 49.759,29.402 50.141,29.436 50.524,29.469 50.906,29.501 51.289,29.533 51.672,29.563 52.054,29.593 52.437,29.621 52.82,29.649 53.203,29.676 53.586,29.701 53.969,29.726 54.352,29.75 54.735,29.774 55.119,29.796 55.502,29.817 55.885,29.837 56.269,29.857 56.652,29.876 57.036,29.893 57.42,29.91 57.804,29.926 58.188,29.941 58.572,29.955 58.956,29.968 59.34,29.98 59.725,29.991 60.109,30.002 60.494,30.011 60.879,30.02 61.263,30.027 61.648,30.034 62.033,30.04 62.418,30.045 62.803,30.049 63.188,30.052 63.573,30.054 63.958,30.055 63.579,27.446 ccw(c64.074,27.375) 64.002,26.88 102.993,21.216 ccw(c103.065,21.711) 103.56,21.639 103.704,22.628 104.826,22.465 ccw(c108.303,22.868) 110.044,19.832 cw(c110.293,19.398) 110.793,19.418 111.419,3.543 111.399,3.542 104.287,3.542 104.287,0 95.1,0 95.1,0.6 ccw(c91.6,0.6) 88.1,0.6 88.1,0 53.3,0 53.3,10.797 ccw(c52.8,10.797) 52.8,11.297 19.404,11.297 ccw(c19.404,10.797) 18.904,10.797 18.904,9.897 13.904,9.897 13.904,10.797 ccw(c13.404,10.797) 13.404,11.297 12.204,11.297 ccw(c12.204,10.797) 11.704,10.797 11.704,9.897
"SOLDERING TIP" on Top Layer "SOLDERING_TIP_L01_P002" (solid, pour order 2): 67.72,5.07 64.1,5.07 64.1,4.29 64.13,4.26 60.95,4.26 60.95,2.15 59.69,0.89 57.753,0.89 57.753,6.977 57.753,7.04 57.75,7.04 59.97,7.04 59.97,9.41 65.02,9.41 67.72,7.306
GND on Bottom Layer "GND_L02_P005" (solid, remove dead copper, pour order 5): -0.013,9.897 -0.013,13.497 8.391,13.497 8.891,12.997 8.891,11.341 9.891,11.341 9.891,12.997 10.391,13.497 68.841,13.497 ccw(c68.841,13.997) 69.341,13.997 69.341,18.797 ccw(c68.841,18.797) 68.841,19.297 10.391,19.297 9.891,19.797 9.891,21.428 8.891,21.428 8.891,19.797 8.391,19.297 -0.013,19.297 -0.013,22.897 11.691,22.897 11.691,21.997 ccw(c12.191,21.997) 12.191,21.497 13.391,21.497 ccw(c13.391,21.997) 13.891,21.997 13.891,22.897 18.891,22.897 18.891,21.997 ccw(c19.391,21.997) 19.391,21.497 54.699,21.497 ccw(c54.699,21.997) 55.199,21.997 55.199,26.198 ccw(c54.699,26.198) 54.699,26.698 45.504,26.698 45.543,28.969 45.925,29.013 46.307,29.056 46.688,29.098 47.07,29.139 47.452,29.179 47.834,29.219 48.216,29.257 48.599,29.295 48.981,29.332 49.363,29.368 49.746,29.403 50.128,29.437 50.511,29.47 50.893,29.502 51.276,29.533 51.659,29.564 52.041,29.593 52.424,29.622 52.807,29.649 53.19,29.676 53.573,29.702 53.956,29.727 54.339,29.751 54.722,29.774 55.106,29.796 55.489,29.818 55.872,29.838 56.256,29.858 56.639,29.876 57.023,29.894 57.407,29.911 57.791,29.926 58.175,29.941 58.559,29.955 58.943,29.969 59.327,29.981 59.712,29.992 60.096,30.002 60.481,30.012 60.866,30.02 61.251,30.028 61.635,30.035 62.02,30.041 62.405,30.045 62.79,30.049 63.175,30.053 63.561,30.055 63.946,30.056 63.567,27.447 ccw(c64.061,27.375) 63.989,26.88 102.98,21.216 ccw(c103.052,21.711) 103.547,21.639 103.691,22.629 104.813,22.466 ccw(c108.29,22.869) 110.031,19.833 cw(c110.28,19.399) 110.78,19.419 111.406,3.544 111.386,3.543 104.274,3.543 104.274,0.001 95.087,0.001 95.087,0.601 ccw(c91.587,0.601) 88.087,0.601 88.087,0.001 53.287,0.001 53.287,10.797 ccw(c52.787,10.797) 52.787,11.297 19.391,11.297 ccw(c19.391,10.797) 18.891,10.797 18.891,9.897 13.891,9.897 13.891,10.797 ccw(c13.391,10.797) 13.391,11.297 12.191,11.297 ccw(c12.191,10.797) 11.691,10.797 11.691,9.897

## Keep-outs
Keep-Out Layer:
  lines w0.1: 111.386,3.543 104.274,3.543 104.274,0.001 95.087,0.001 95.087,0.601 ; 111.406,3.544 110.78,19.419 ; 11.691,10.797 cw(c12.191,10.797) 12.191,11.297 13.391,11.297 cw(c13.391,10.797) 13.891,10.797 13.891,9.897 18.891,9.897 18.891,10.797 cw(c19.391,10.797) 19.391,11.297 52.787,11.297 cw(c52.787,10.797) 53.287,10.797 ; 11.691,10.797 11.691,9.897 -0.013,9.897 -0.013,13.497 8.391,13.497 8.891,12.997 8.891,11.341 9.891,11.341 9.891,12.997 10.391,13.497 68.841,13.497 ccw(c68.841,13.997) 69.341,13.997 ; 11.691,10.797 11.691,10.797 ; 11.691,21.997 ccw(c12.191,21.997) 12.191,21.497 13.391,21.497 ccw(c13.391,21.997) 13.891,21.997 13.891,22.897 18.891,22.897 18.891,21.997 ccw(c19.391,21.997) 19.391,21.497 54.699,21.497 ccw(c54.699,21.997) 55.199,21.997 55.199,26.198 ccw(c54.699,26.198) 54.699,26.698 ; 11.691,21.997 11.691,21.997 ; 11.691,21.997 11.691,22.897 -0.013,22.897 -0.013,19.297 8.391,19.297 8.891,19.797 8.891,21.428 9.891,21.428 9.891,19.797 10.391,19.297 68.841,19.297 cw(c68.841,18.797) 69.341,18.797 ; 53.287,10.797 53.287,0.001 88.087,0.001 88.087,0.601 cw(c91.587,0.601) 95.087,0.601 ; 53.287,10.797 53.287,10.797 ; 54.699,26.698 45.504,26.698 45.543,28.969 45.925,29.013 46.307,29.056 46.688,29.098 47.07,29.139 47.452,29.179 47.834,29.219 48.216,29.257 48.599,29.295 48.981,29.332 49.363,29.368 49.746,29.403 50.128,29.437 50.511,29.47 50.893,29.502 51.276,29.533 51.659,29.564 52.041,29.593 52.424,29.622 52.807,29.649 53.19,29.676 53.573,29.702 53.956,29.727 54.339,29.751 54.722,29.774 55.106,29.796 55.489,29.818 55.872,29.838 56.256,29.858 56.639,29.876 57.023,29.894 57.407,29.911 57.791,29.926 58.175,29.941 58.559,29.955 58.943,29.969 59.327,29.981 59.712,29.992 60.096,30.002 60.481,30.012 60.866,30.02 61.251,30.028 61.635,30.035 62.02,30.041 62.405,30.045 62.79,30.049 63.175,30.053 63.561,30.055 63.946,30.056 63.567,27.447 ; 54.699,26.698 54.699,26.698 ; 63.567,27.447 ccw(c64.061,27.375) 63.989,26.88 ; 63.567,27.447 63.567,27.447 ; 63.989,26.88 102.98,21.216 ; 63.989,26.88 63.989,26.88 ; 69.341,13.997 69.341,18.797 ; 69.341,13.997 69.341,13.997 ; 69.341,18.797 69.341,18.797 ; 95.087,0.601 95.087,0.601 ; 102.98,21.216 ccw(c103.052,21.711) 103.547,21.639 ; 102.98,21.217 102.98,21.216 ; 103.547,21.639 103.691,22.629 104.813,22.466 ; 103.547,21.639 103.547,21.639 ; 104.813,22.466 ccw(c108.29,22.869) 110.031,19.833 ; 104.813,22.466 104.813,22.466 ; 110.031,19.833 cw(c110.28,19.399) 110.78,19.419 ; 110.031,19.833 110.031,19.833 ; 110.78,19.419 110.78,19.419

## Silkscreen, mask and mechanical layers (free items; w line width, h text height)
Mechanical 5:
  lines w0.013: 37.987,19.297 37.987,17.317 ccw(c38.362,17.345) 38.387,16.97 42.487,16.97 ; 38.014,20.197 38.09,20.197 ; 38.014,20.597 38.09,20.597 ; 39.06,20.197 38.984,20.197 ; 39.06,20.597 38.984,20.597 ; 41.014,20.197 41.09,20.197 ; 41.014,20.597 41.09,20.597 ; 42.06,20.197 41.984,20.197 ; 42.06,20.597 41.984,20.597 ; 42.487,19.297 42.487,16.97 ; 42.677,19.297 42.677,16.958 ; 44.61,19.297 50.515,18.506 ; 46.155,19.297 50.619,18.699 ; 52.577,19.056 52.294,19.198 ccw(c52.215,19.018) 52.115,19.186 ; 61.794,13.596 62.077,13.737 ccw(c61.953,13.93) 62.181,13.954 ; 38.09,20.197 38.486,20.197 ; 38.09,20.197 38.09,20.597 ; 38.09,20.597 38.486,20.597 ; 38.486,20.197 38.588,20.197 ; 38.486,20.197 38.486,20.597 ; 38.486,20.597 38.588,20.597 ; 38.588,20.197 38.588,20.597 ; 38.588,20.197 38.984,20.197 ; 38.588,20.597 38.984,20.597 ; 38.984,20.197 38.984,20.597 ; 41.09,20.197 41.486,20.197 ; 41.09,20.197 41.09,20.597 ; 41.09,20.597 41.486,20.597 ; 41.486,20.197 41.588,20.197 ; 41.486,20.197 41.486,20.597 ; 41.486,20.597 41.588,20.597 ; 41.588,20.197 41.984,20.197 ; 41.588,20.197 41.588,20.597 ; 41.588,20.597 41.984,20.597 ; 41.984,20.197 41.984,20.597 ; 42.487,16.97 cw(c42.488,15.53) 42.677,16.958 ; 42.677,16.958 50.515,15.908 ; 46.161,28.784 46.135,29.033 46.732,29.094 ; 46.161,28.784 46.222,28.188 46.609,27.389 ccw(c46.699,27.432) 46.709,27.333 49.897,27.658 ccw(c49.887,27.758) 49.984,27.733 50.201,28.594 50.115,29.44 46.732,29.094 ; 46.161,28.784 46.758,28.845 46.732,29.094 ; 47.487,12.765 47.487,12.197 51.587,12.197 51.587,12.765 ; 47.487,12.765 47.487,15.277 ; 47.487,12.765 51.587,12.765 ; 47.487,15.277 cw(c47.862,15.248) 47.887,15.623 ; 47.487,15.277 47.487,15.477 cw(c47.862,15.448) 47.887,15.823 ; 47.887,15.623 47.887,15.823 ; 47.887,15.623 51.987,15.623 ; 47.887,15.823 51.987,15.823 ; 50.515,15.908 ccw(c50.812,17.866) 51.613,16.055 ; 50.515,15.908 50.515,18.506 ; 50.515,18.506 ccw(c50.812,20.464) 51.613,18.653 ; 50.515,18.506 50.619,18.699 ; 50.619,18.699 ccw(c50.811,19.968) 51.33,18.794 ; 51.33,18.794 51.613,18.653 ; 51.33,18.794 52.115,19.186 ; 51.587,12.765 51.587,13.025 51.987,13.025 ; 51.613,16.055 52.398,16.447 ccw(c52.102,16.945) 52.681,16.935 52.681,18.84 52.675,18.905 52.659,18.962 52.633,19.009 52.598,19.044 52.555,19.065 52.506,19.073 52.453,19.066 52.398,19.045 ; 51.613,16.055 51.613,18.653 ; 51.613,18.653 52.398,19.045 ; 51.987,13.025 ccw(c51.988,15.247) 52.281,13.045 ; 51.987,13.025 51.987,15.623 ; 51.987,15.623 ccw(c51.988,17.845) 52.281,15.643 ; 51.987,15.623 51.987,15.823 ; 51.987,15.823 ccw(c51.988,17.263) 52.177,15.836 ; 52.115,19.186 52.398,19.045 ; 52.177,15.836 52.281,15.643 ; 52.177,15.836 60.015,16.886 ; 52.281,13.045 52.281,15.643 ; 52.281,13.045 60.119,14.095 ; 52.281,15.643 60.119,16.693 ; 52.508,29.379 52.496,29.629 53.095,29.66 ; 52.508,29.379 52.539,28.78 52.886,27.962 ccw(c52.978,28.001) 52.983,27.901 56.183,28.067 ccw(c56.178,28.166) 56.274,28.137 56.534,28.986 56.49,29.835 53.095,29.66 ; 52.508,29.379 53.108,29.41 53.095,29.66 ; 58.851,29.722 58.865,29.122 59.186,28.295 ccw(c59.28,28.331) 59.282,28.231 62.486,28.302 ccw(c62.484,28.402) 62.578,28.37 62.864,29.21 62.845,30.06 59.446,29.985 ; 58.851,29.722 58.846,29.972 59.446,29.985 ; 58.851,29.722 59.451,29.736 59.446,29.985 ; 60.015,16.886 cw(c60.312,14.927) 61.113,16.739 ; 60.015,16.886 60.119,16.693 ; 60.119,14.095 cw(c60.311,12.825) 60.83,13.999 ; 60.119,14.095 60.119,16.693 ; 60.119,16.693 cw(c60.311,15.423) 60.83,16.598 ; 60.83,13.999 60.83,16.598 ; 60.83,13.999 61.615,13.607 61.67,13.586 61.723,13.579 61.772,13.587 61.815,13.609 61.85,13.644 61.876,13.69 61.892,13.747 61.898,13.812 ; 60.83,16.598 61.113,16.739 ; 60.83,16.598 61.615,16.205 ; 61.113,16.739 61.898,16.347 ; 61.615,16.205 cw(c61.319,15.708) 61.898,15.717 ; 61.615,16.205 61.898,16.347 ; 61.898,13.812 62.181,13.954 ; 61.898,13.812 61.898,15.717 ; 61.898,15.717 62.181,15.859 ; 61.898,16.347 cw(c61.602,15.849) 62.181,15.859 ; 62.181,13.954 62.181,15.859